# Altium PCB LED.PcbDoc
Units mm, origin at the board's own origin, x right, y up, seen from the top; angles counter-clockwise.
Board outline 32.5 x 32.5 mm, 2 copper layers (Top Layer, Bottom Layer), stack 1.569 mm thick; 19 components, 10 nets, 47 pads, 32 vias.
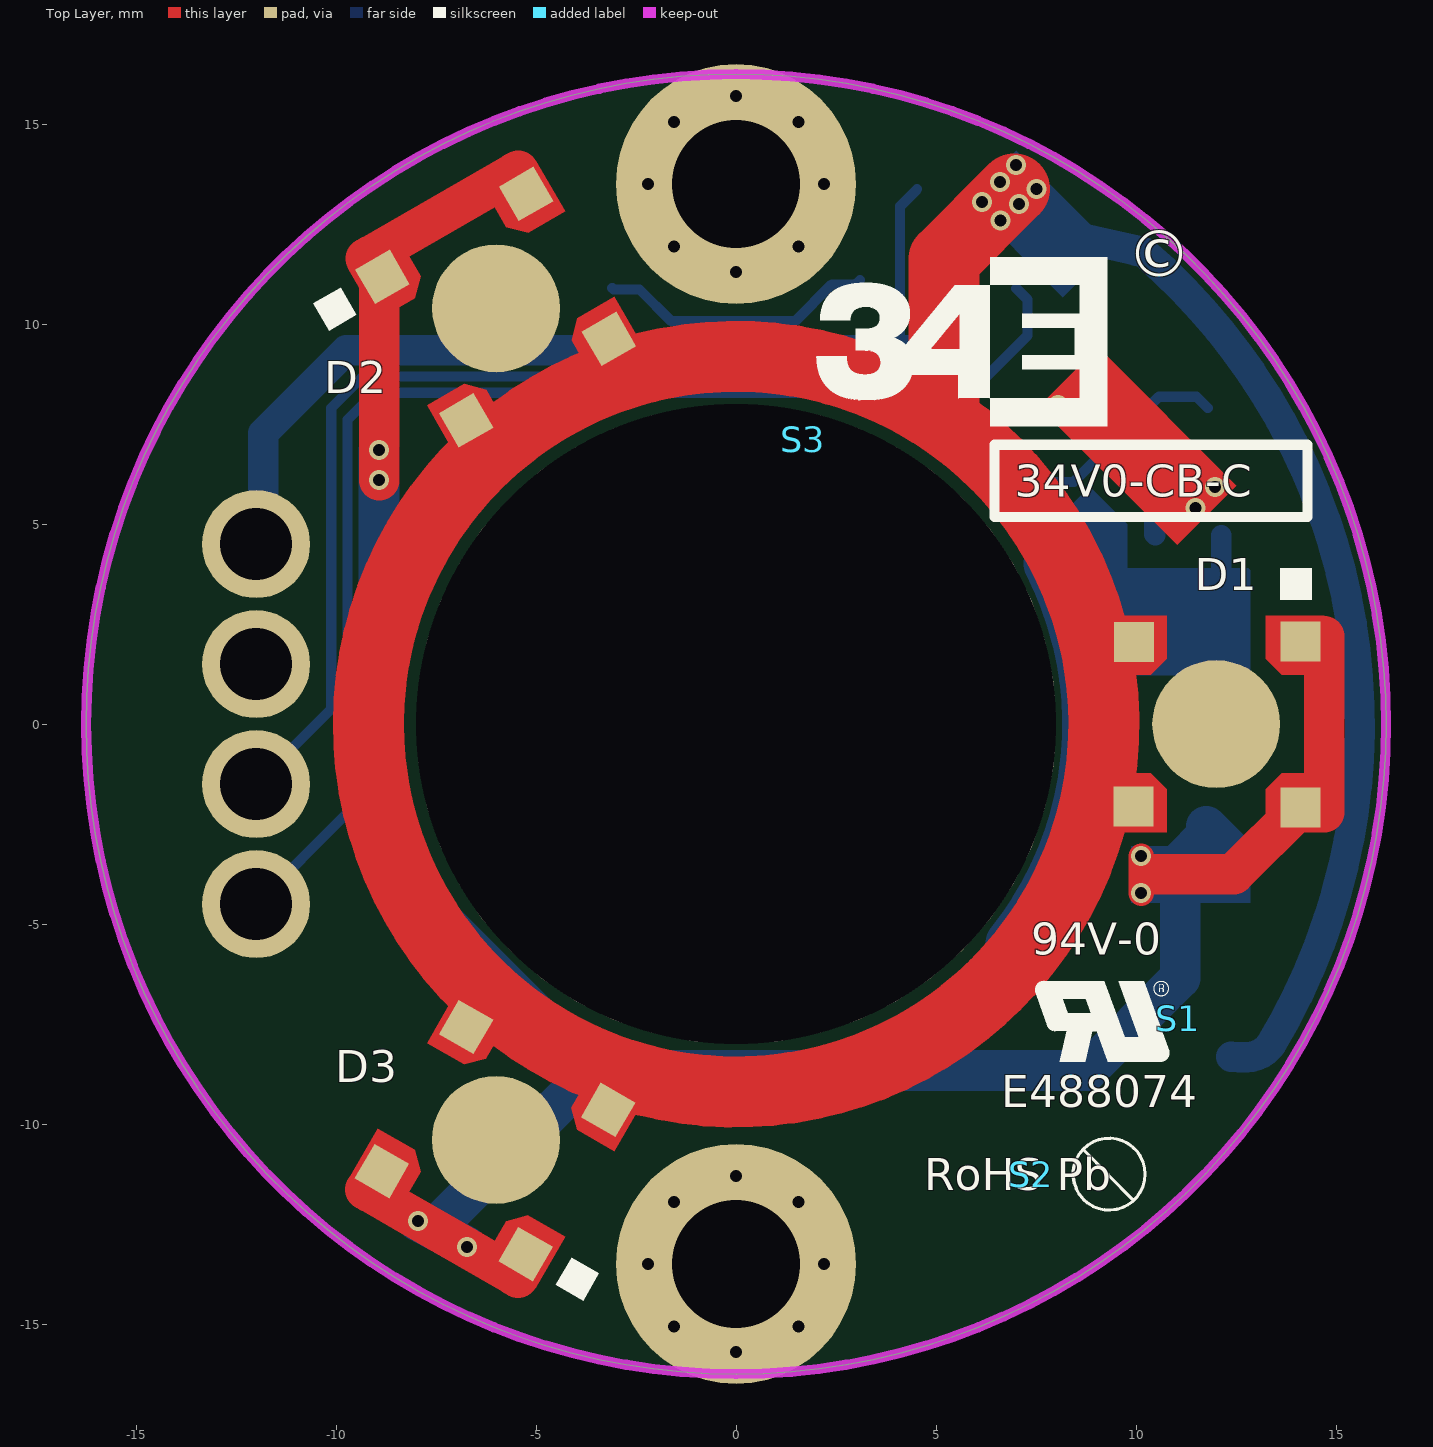
[diagram p0: Top Layer view]
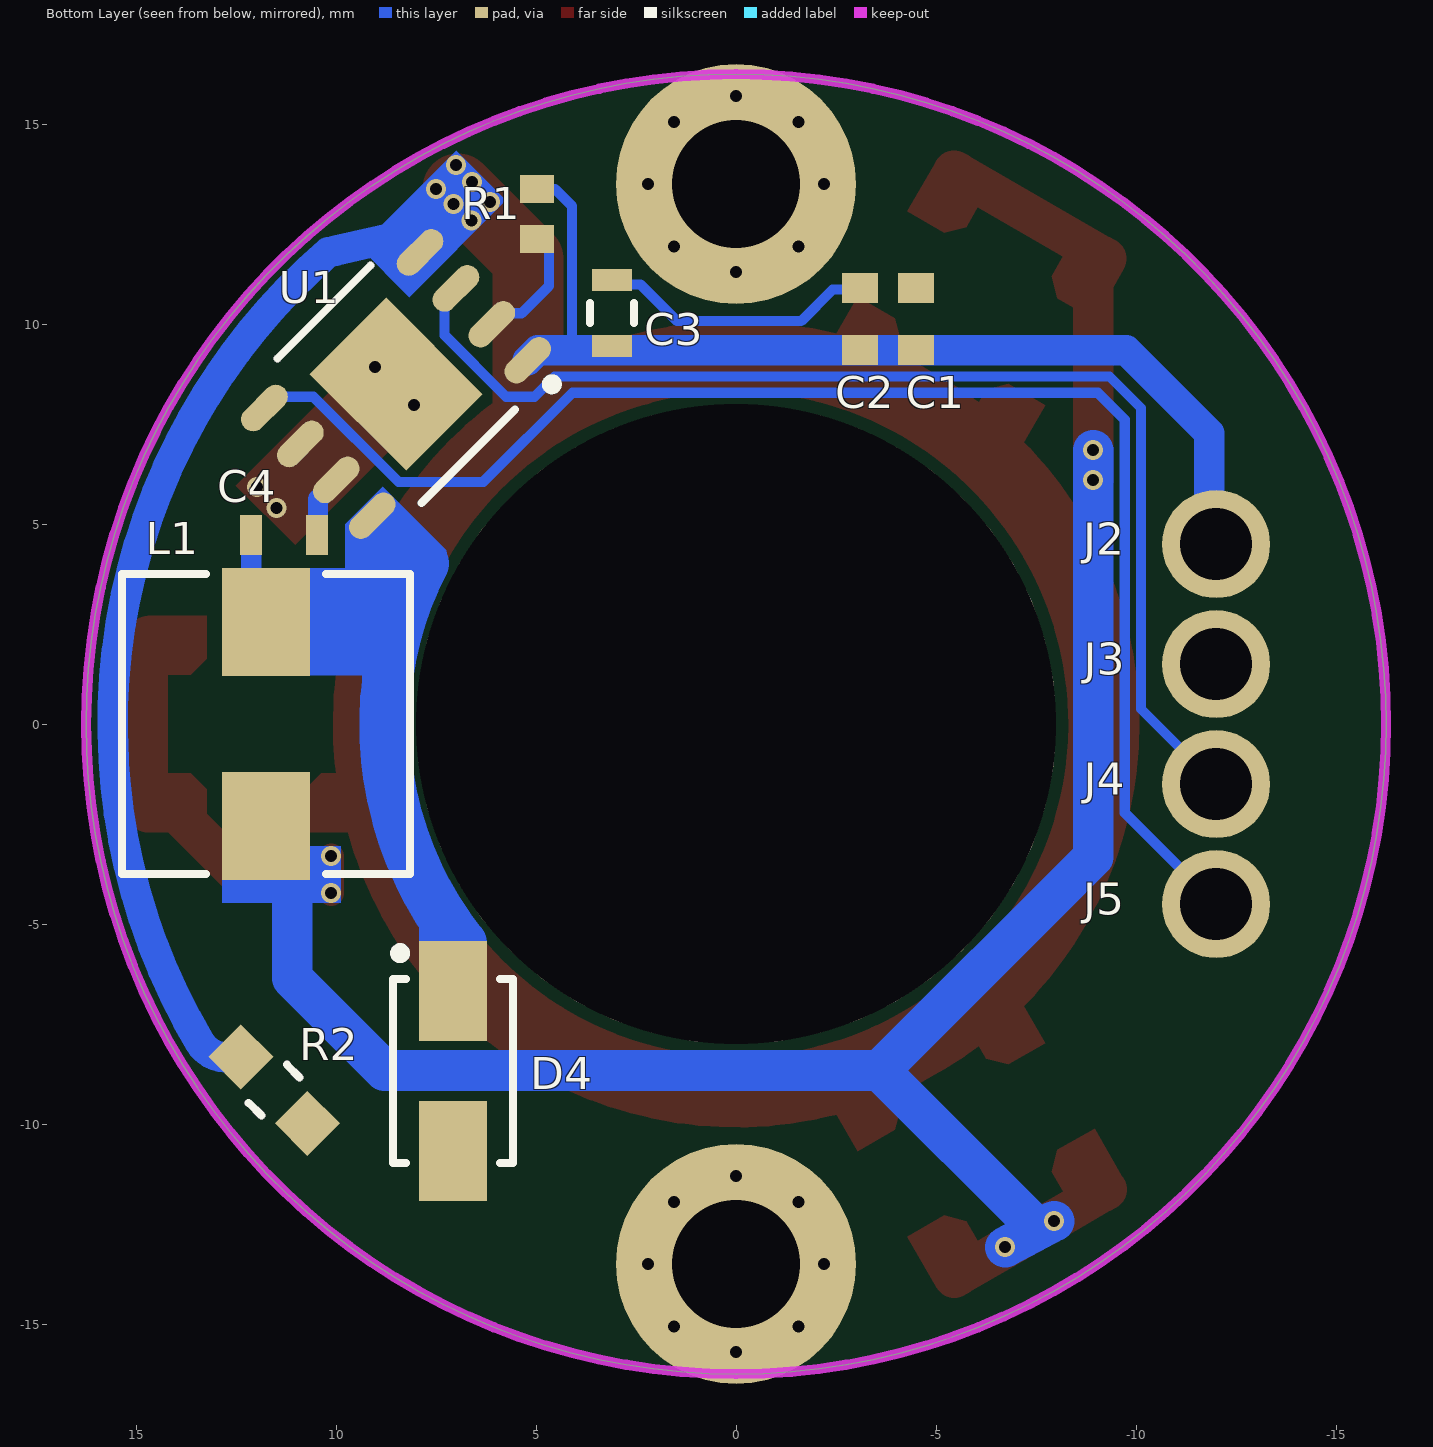
[diagram p1: Bottom Layer view, seen from below]
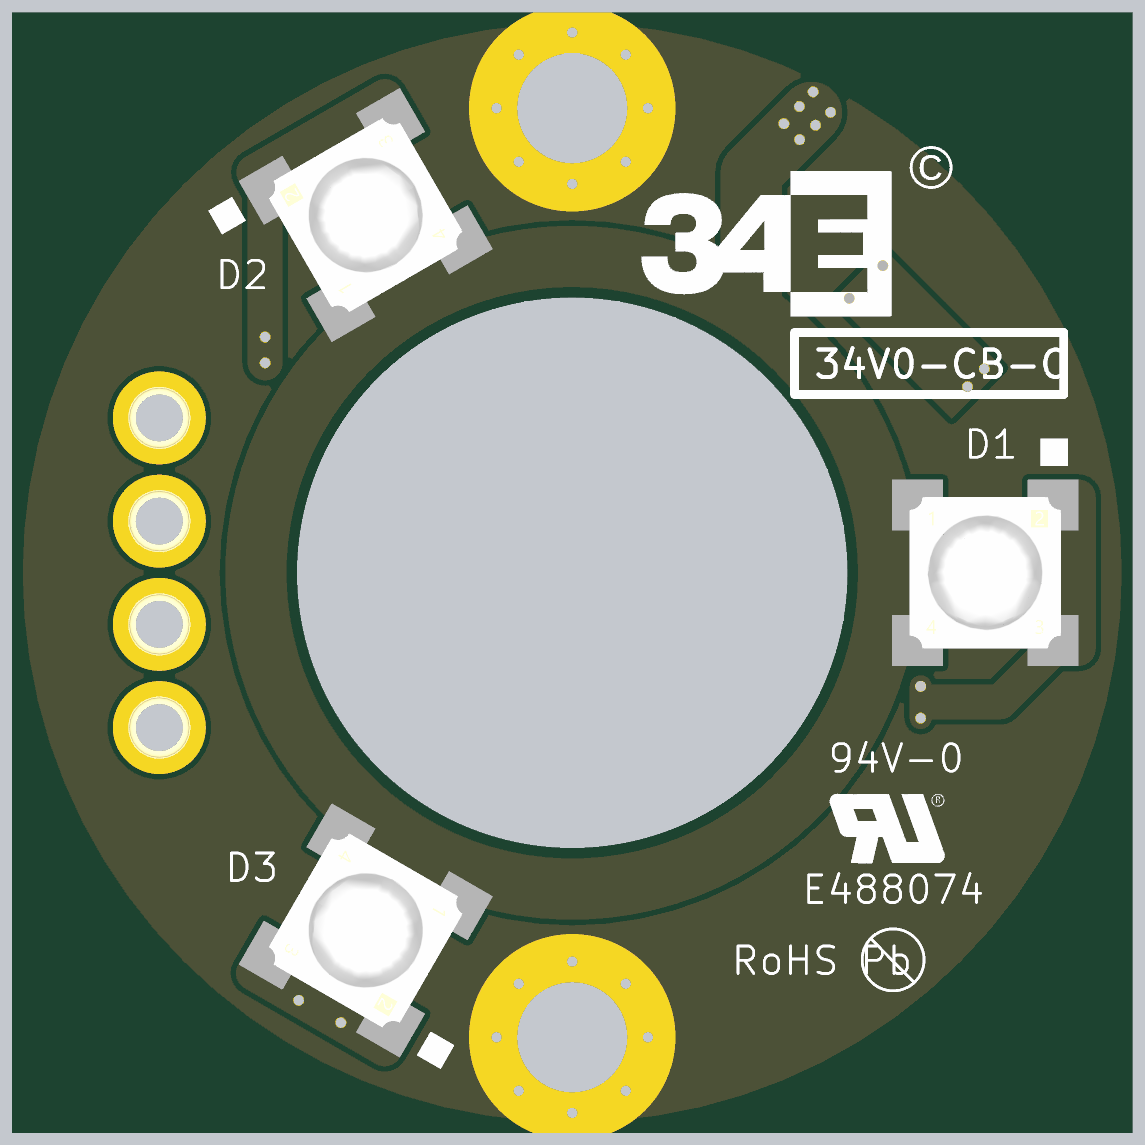
[diagram p2: 3D render of the assembled board from above, using the file's embedded part models]
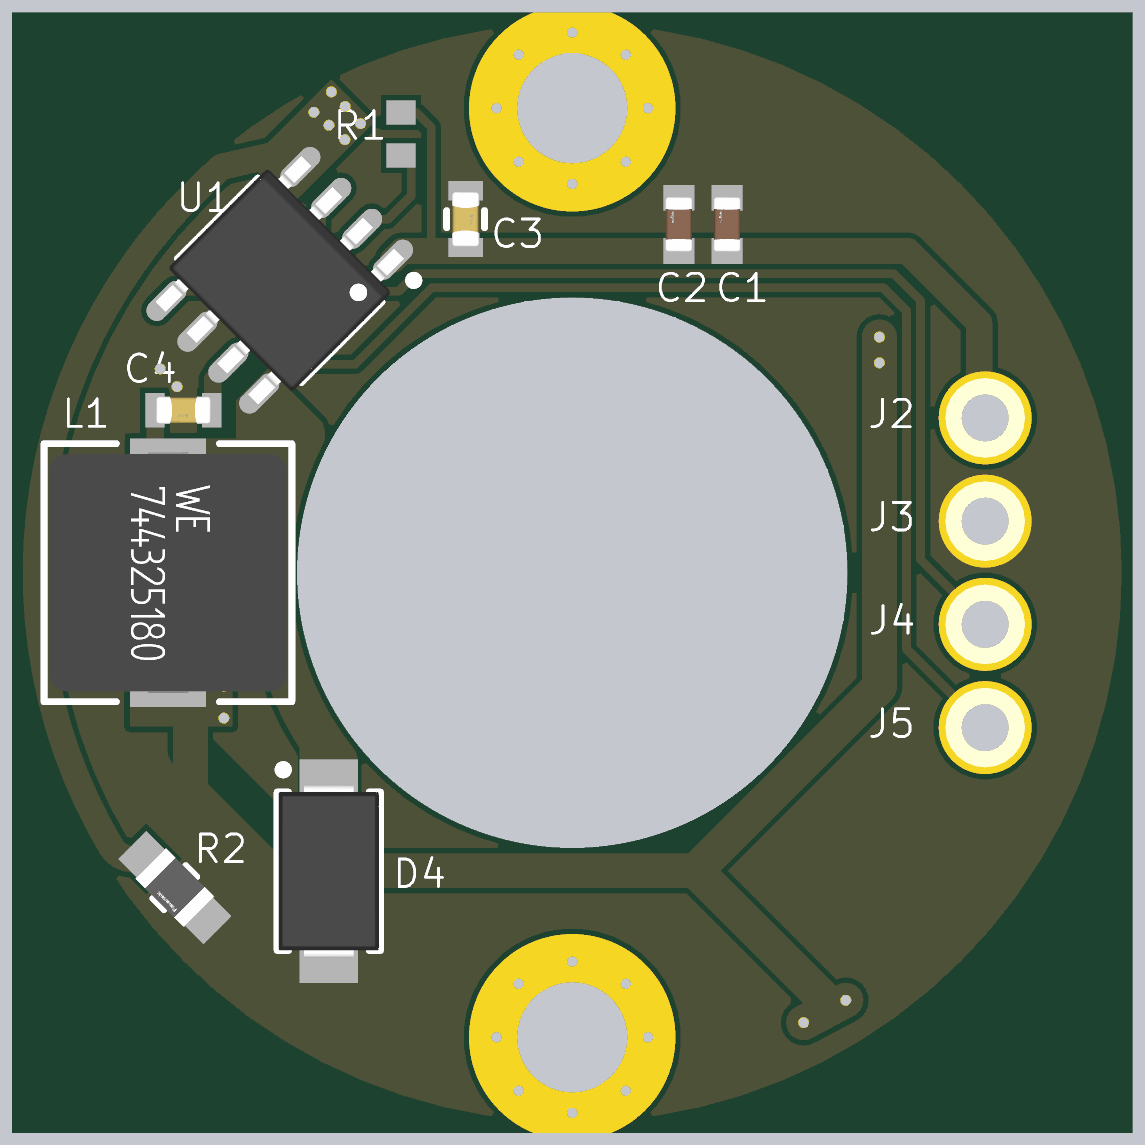
[diagram p3: 3D render of the assembled board from below, using the file's embedded part models]

## Layer stack, top to bottom
Top Solder: solder mask 0.0254, SM-001, Dk 4
Top Layer: signal copper 0.035
Dielectric 1: core 1.4986, Core-043, Dk 4.3
Bottom Layer: signal copper 0.035
Bottom Solder: solder mask 0.0254, SM-001, Dk 4

## Board outline
0,-16.25 cw(c0,0) -16.25,0 cw(c0,0) 0,16.25 cw(c0,0) 16.25,0 cw(c0,0)

## Design rules (kind name [scope] priority, off if disabled: settings)
BoardOutlineClearance BoardOutlineClearance_Polygon [IsPolygon] p1: gap=0.25 ignorepadtopadclearanceinfootprint=FALSE
Clearance [All] p1: gap=0.152 ignorepadtopadclearanceinfootprint=FALSE except(0.203: SMDPad-SMDPad)
HoleSize [All] p1: absolutevalues=TRUE maxlimit=254 minlimit=0.025 maxpercent=80.000 minpercent=20.000
MinimumSolderMaskSliver [All] p1: minsoldermaskwidth=0.127
PlaneClearance [All] p1: clearance=0.203
PlaneConnect [All] p1: planeconnectstyle=Direct reliefexpansion=0.508 reliefentries=4 reliefconductorwidth=0.254 reliefairgap=0.254
PolygonConnect [All] p1: connectstyle=Direct reliefconductorwidth=0.254 reliefentries=4 polygonreliefangle="90 Angle" airgapwidth=0.254
RoutingVias [All] p1: holewidth=0.711 width=1.27 viastyle="Through Hole" minholewidth=0.711 minwidth=1.27 maxholewidth=0.711 maxwidth=1.27
SilkToSilkClearance [All] p1: silktosilkclearance=0
SilkToSolderMaskClearance [IsPad] p1: minsilkscreentomaskgap=0.152 clearancetoexposedcopper=TRUE
SolderMaskExpansion SolderMaskExpansion_Via [Isvia] p1: expansion=0.102 istentingtop=TRUE
SolderMaskExpansion [Not Isvia] p2: expansion=0.051 istentingtop=FALSE
Width [All] p1: maxlimit=12.7 minlimit=0.254 preferedwidth=0.254 minimp=50.000000 maximp=50.000000 favimp=50.000000
24 further rules are at their usual default settings.

## Components (designator, comment, footprint, x,y, rotation, side; value= is the part's Value field where it differs from the comment)
C1 "10uF" FP-GRM188-0_2-MFG -4.5,10.125 r90 bottom
C2 "10uF" FP-GRM188-0_2-MFG -3.096,10.125 r90 bottom
C3 "100nF" FP-CGA3E-0_3-0_1-IPC_C 3.1,10.275 r270 bottom
C4 "100nF" FP-CGA3E-0_3-0_1-IPC_C 11.3,4.725 r0 bottom
D1 "LZ1-00R702-0000" LZ1-00R702-0000 12.003,0 r0 top locked
D2 "LZ1-00R702-0000" LZ1-00R702-0000 -6.001,10.395 r120 top locked
D3 "LZ1-00R702-0000" LZ1-00R702-0000 -6.002,-10.395 r240 top locked
D4 "B340AE-13" B340AE-13 7.075,-8.675 r90 bottom
J2 "7406-0-15-15-18-27-10-0" 7406-0-15-15-18-27-10-0 -12,4.5 r180 bottom locked
J3 "7406-0-15-15-18-27-10-0" 7406-0-15-15-18-27-10-0 -12,1.5 r180 bottom locked
J4 "7406-0-15-15-18-27-10-0" 7406-0-15-15-18-27-10-0 -12,-1.5 r180 bottom locked
J5 "7406-0-15-15-18-27-10-0" 7406-0-15-15-18-27-10-0 -12,-4.5 r180 bottom locked
L1 "744314101" WE-HCI-7050 11.75,0 r270 bottom locked
R1 "430k 1%" RESC1608X55X30LL15T15 4.975,12.75 r90 bottom
R2 "100m" FP-ERJ6D-MFG 11.55,-9.15 r45 bottom
S1 "" UL 11.05,-7.35 r0 top
S2 "" RoHS 7.375,-11.25 r0 top
S3 "" 34EngineeringLogo 1.675,7.125 r0 top
U1 "IS32LT3954-GRLA3-TR" IS32LT3954-GRLA3-TR 8.5,8.5 r315 bottom locked

## Footprints (in the part's own frame and the unit in brackets; to place one, negate y for a bottom-side part, rotate by r counter-clockwise, add the part's x,y. Pads: shape width x height; smd on the part's side, far side on the other; paste and mask are expansions set on the pad)
34EngineeringLogo [mm]
  silkscreen extent 0.33,0.32 7.61,4.55
7406-0-15-15-18-27-10-0 [mm]
  round 2.7 hole 1.803: 1(0,0)
  body extent -1.15,-1.16 1.15,1.15, height 0.7
B340AE-13 [mm] "Molded Diode, 2-Leads, Body 4.30x2.61mm, IPC Medium Density"
  rect 2.5x1.7 smd: A(-2,0) C(2,0)
  silkscreen extent -2.3,-1.5 3.07,1.5, body extent -2.52,-1.46 2.52,1.46, height 2.4
FP-CGA3E-0_3-0_1-IPC_C [mm]
  rect 0.556x1.006 smd paste+0 mask+0: 1(-0.825,0) 2(0.825,0)
  silkscreen extent -0.25,-0.55 0.25,0.55, body extent -0.8,-0.4 0.8,0.4, height 1.1
FP-ERJ6D-MFG [mm]
  rect 1.15x1.15 smd paste+0 mask+0: 1(-1.175,0) 2(1.175,0)
  silkscreen extent -0.23,-0.68 0.23,0.68, body extent -1,-0.62 1,0.62, height 0.7
FP-GRM188-0_2-MFG [mm]
  rect 0.75x0.9 smd paste+0 mask+0: 1(-0.775,0) 2(0.775,0)
  body extent -0.8,-0.4 0.8,0.4, height 1
IS32LT3954-GRLA3-TR [mm] "SOIC, 8-Leads, Body 4.90x3.90mm, Pitch 1.27mm, Thermal Pad 3.41x2.71mm, IPC Medium Density"
  oval 1.4x0.6 smd: 1(-2.75,1.905) 2(-2.75,0.635) 3(-2.75,-0.635) 4(-2.75,-1.905) 5(2.75,-1.905) 6(2.75,-0.635) 7(2.75,0.635) 8(2.75,1.905)
  rect 2.71x3.41 smd: 9(0,0)
  silkscreen extent -2.87,-2.55 1.65,2.88, body extent -3,-2.55 3,2.55, height 1.7
LZ1-00R702-0000 [mm]
  rect 1x1 smd paste+0 mask+0: 1(-2.05,2.05) 2(2.103,2.068) 3(2.103,-2.082) 4(-2.072,-2.057)
  round 3.2 smd: 5(0,0)
  Top Layer region: -2.704,-2.704 -2.704,-1.234 -1.634,-1.234 -1.234,-1.634 -1.234,-2.704
  Top Layer region: 2.704,2.704 2.704,1.234 1.634,1.234 1.234,1.634 1.234,2.704
  Top Layer region: 2.704,-2.704 1.234,-2.704 1.234,-1.634 1.634,-1.234 2.704,-1.234
  Top Layer region: -2.704,2.704 -1.234,2.704 -1.234,1.634 -1.634,1.234 -2.704,1.234
  silkscreen extent 1.6,3.1 2.4,3.9, body extent -2.2,-2.2 2.2,2.2, height 2.4
RESC1608X55X30LL15T15 [mm] "Chip Resistor, 2-Leads, Body 1.60x0.80mm, IPC High Density"
  rect 0.7x0.85 smd: 1(-0.625,0) 2(0.625,0)
  body extent -0.87,-0.48 0.87,0.48, height 0.55
RoHS [mm]
  silkscreen extent 1.05,-0.9 2.85,0.9
UL [mm]
  silkscreen extent -3.57,-1.1 -0.22,0.93
WE-HCI-7050 [mm] "SMD Inductor, 2-Leads, Body 7.0 x 6.9 mm"
  rect 2.7x2.2 smd: 1(-2.55,0) 2(2.55,0)
  silkscreen extent -3.75,-3.6 3.75,3.6, body extent -3.5,-3.45 3.5,3.45, height 4.98

## Part data
C1 C2: library part CMP-2006-02520-2, "Chip Multilayer Ceramic Capacitors for General Purpose, 0603, 10uF, X5R, 15%, 20%, 25V", Case Code (Imperial)=0603, Case Code (Metric)=1608, Dielectric=X5R, Max Operating Temperature=85°C, Min Operating Temperature=-55°C, Package Quantity=1, Resistor Type=Ceramic, Tolerance=20%, Voltage=25V, Capacitance=10uF, Case/Package=0603, Depth=0.8mm, Height=0.8mm, Lead Free="Lead Free", Length=1.6mm, Mount="Surface Mount", Number of Pins=2, Packaging="Tape and Reel", REACH SVHC="No SVHC", Termination=SMD/SMT, Thickness=0.031inch, Voltage Rating=25V, Voltage Rating (DC)=25V, Weight=0.000222oz, Width=0.031inch
C3 C4: library part CMP-2000-07546-2, "Cap Ceramic 100nF 50V X7R 10% Pad SMD 0603 +125°C Automotive T/R", Case Code (Imperial)=0603, Case Code (Metric)=1608, Dielectric=X7R, Max Operating Temperature=125°C, Min Operating Temperature=-55°C, Package Quantity=1, Ratings=AEC-Q200, Tolerance=10%, Voltage=50V, Capacitance=100nF, Case/Package=0603, Composition=Ceramic, Depth=0.8mm, Height=0.8mm, Lead Free="Lead Free", Length=1.6mm, Mount="Surface Mount", Packaging="Tape and Reel", Radiation Hardening=No, REACH SVHC="No SVHC", Termination=SMD/SMT, Thickness=0.035inch, Voltage Rating=50V, Voltage Rating (DC)=50V, Weight=7.1E-05oz, Width=0.8mm
D1 D2 D3: "IR Emitter 940nm 1600mW 1200mA 3.05V 4-Pin CSMD T/R", Case/Package=SMD/SMT, Forward Voltage=3V, Manufacturer="LED Engin", ComponentLink1Description=http://www.ledengin.com/files/products/LZ1/LZ1-00R702.pdf?src-supplier=Digi-Key, ComponentLink1URL=http://www.ledengin.com/files/products/LZ1/LZ1-00R702.pdf?src-supplier=Digi-Key, Manufacturer Part Number=LZ1-00R702-0000, Mount="Surface Mount", Orientation="Top View", Packaging="Tape and Reel", RoHS=Yes, Supplier 1="Arrow Electronics", Supplier Part Number 1=LZ1-00R702-0000, Touchscreen="Infrared (IR)", Viewing Angle=90°, Wavelength=940nm
D4: "Rectifier Diode Schottky 40V 3A 2-Pin SMA T/R", Average Rectified Current=2A, Case/Package=SMA, Manufacturer=Diodes, Max Reverse Voltage (DC)=40V, Supplier Part Number 1=07AH3680, Category="Rectifier Diodes", ComponentLink1Description=https://www.diodes.com/assets/Datasheets/B320AE-B345AE.pdf?src-supplier=Digi-Key, ComponentLink1URL=https://www.diodes.com/assets/Datasheets/B320AE-B345AE.pdf?src-supplier=Digi-Key, Manufacturer Part Number=B340AE-13, Mount="Surface Mount", Packaging="Tape and Reel", Pricing 1="1=0.56000, 5=0.56000, 10=0.46300, 25=0.41400, 50=0.36500, 100=0.31600, 250=0.27700, 500=0.23700, 1000=0.17800 (USD)", RoHS=Yes, RoHS Compliant=Yes, Stock 1=4255, Supplier 1=Newark
J2 J3 J4 J5: "3.05 mm PCB Through Hole Pin Receptacle for (0.94 to 1.09 mm Pin) w/ No Tail", Current Rating=8A, Manufacturer=Mill-Max, Package Quantity=500, Category=Terminals, ComponentLink1Description=https://datasheet.ciiva.com/12487/7406-0-15-15-18-27-10-0-72490-12487100.pdf?src-supplier=Mouser, ComponentLink1URL=https://datasheet.ciiva.com/12487/7406-0-15-15-18-27-10-0-72490-12487100.pdf?src-supplier=Mouser, Hole Diameter=1.8mm, Lead Free="Contains Lead", Length=0.12inch, Manufacturer Part Number=7406-0-15-15-18-27-10-0, Material="BERYLLIUM COPPER ALLOY", Mount="Through Hole", Outside Diameter=2.31mm, Packaging=Bulk, Plating=Gold, Pricing 1="1=0.49460, 10=0.42540 (USD)", RoHS=Yes, RoHS Compliant=Yes, Stock 1=1000, Supplier 1="Arrow Electronics", Supplier Part Number 1=7406-0-15-15-18-27-10-0, Termination=Solder
L1: library part CMP-0226-00077-1, "SMD Flat Wire High Current Inductor WE-HCI, L=10.0 µH", Inductance="10.0 ÂµH", ComponentLink1Description="Manufacturer Link", ComponentLink1URL=http://www.we-online.com, ComponentLink2Description=Datasheet, ComponentLink2URL=http://www.we-online.de/katalog/media/pdf/744314101.pdf, DatasheetVersion="ver 1, Aug-2009", PackageDescription="SMD Inductor, 2-Leads, Body 7.0 x 6.9 mm", PackageReference=WE-HCI-7050, PackageVersion=2008
R1: library part CMP-2000-00500-1, Manufacturer=Panasonic, Part Number=ERJ-3EKF4303V
R2: library part CMP-05422-000098-1, "RES 0.1 OHM 1% 1/2W 0805", Case Code (Imperial)=0805, Case Code (Metric)=2012, Max Operating Temperature=155°C, Max Power Dissipation=500mW, Min Operating Temperature=-55°C, Resistance=100mR, Resistor Type="Thick Film", Temperature Coefficient=150ppm/°C, Tolerance=1%, Case/Package=0805, Features="Automotive AEC-Q200", Height=0.028inch, Length=0.079inch, Number of Terminations=2, Packaging="Cut Tape", Width=0.049inch
S1: library part UL
S2: library part RoHS
S3: library part 34EngineeringLogo, "34 Engineering Silkscreen Logo"
U1: "3.0A Dimmable Buck Switching Regulator with Fault Reporting, Spread Spectrum, SOP-8-EP", Manufacturer=ISSI, Supplier Part Number 1=2521-IS32LT3954-GRLA3-TRCT-ND, Manufacturer Part Number=IS32LT3954-GRLA3-TR, Pricing 1="1=1.94000, 10=1.74200, 25=1.64320, 100=1.39980, 250=1.31440, 500=1.15010, 1000=0.95294 (USD)", RoHS=Yes, RoHS Compliant=Yes, Stock 1=27850, Supplier 1=Digi-Key

## Free pads (board coordinates)
  round 6 hole 3.2 unplated: 1(0,-13.5) 1(0,13.5)
  round 16 hole 16 unplated: 1(0,0)

## Via types
v1: diameter 0.5, hole 0.3, Top Layer to Bottom Layer, tented both sides, 32 vias

## Nets (pads, with @x,y where several pads share a name; then routed paths per layer and width w, separated by ;. In a path a pad name is that pad's centre, name@x,y a point inside that pad or via, vN(x,y) a via of type N, cw(c..) or ccw(c..) an arc to the next point about the centre after c; other vN are vias at no path point)
+12: C1.1 C2.1 C3.2 J2.1 R1.2 U1.1 | length 26.3
  Bottom Layer w0.254: -6.35,9.4 -6.3,9.35 ; C3.2@2.742,9.383 C3.2@2.775,9.35 ; C3.2 3.951,9.45 4.1,9.599 4.1,12.95 4.525,13.375
  Bottom Layer w0.762: J2.1@-11.825,4.082 -11.825,7.275 -9.75,9.35 -6.3,9.35 2.775,9.35 3.525,9.35 3.882,9.35 4.956,9.35 U1.1
ENC: D1.5 D2.5 D3.5 pad.1@0,13.5 pad.1@0,-13.5
  other v1: 0,-15.7 -1.556,-15.056 1.556,-15.056 -2.2,-13.5 2.2,-13.5 -1.556,-11.944 1.556,-11.944 0,-11.3 0,11.3 -1.556,11.944 1.556,11.944 -2.2,13.5 2.2,13.5 -1.556,15.056 1.556,15.056 0,15.7
GND: C1.2 C2.2 C3.1 D4.A J3.1 R2.1 U1.6 U1.9 | length 7
  Bottom Layer w0.254: C2.2 -3.06,10.864 -2.414,10.864 -1.625,10.075 1.475,10.075 2.394,10.994 2.994,10.994 C3.1
  other v1: 11.486,5.407 11.975,5.925 8.05,7.975 9.025,8.925
LED_A: D1.2 D1.3 D2.2 D2.3 D3.2 D3.3 L1.2 | length 68.6
  Top Layer w0.635: v1(10.125,-4.225) v1(10.125,-3.3)
  Top Layer w1.016: -9.265,-11.633 -9.157,-11.695 -7.936,-12.401 -6.736,-13.094 -5.563,-13.77 -5.452,-13.835 ; -9.253,11.64 -9.144,11.703 -5.55,13.778 -5.447,13.837 ; v1(-8.925,6.1) v1(-8.925,6.85) -8.925,11.1 D2.2 ; 10.4,-3.751 12.437,-3.751 D1.3 ; 14.706,-2.201 14.706,2.2
  Bottom Layer w1.016: v1(-8.925,6.85) -8.927,6.848 -8.927,-3.321 -3.587,-8.66 ; v1(-7.95,-12.425) v1(-6.725,-13.075) ; -7.7,-12.525 -7.452,-12.525 -3.587,-8.66 ; L1.2@11.1,-3.771 11.1,-6.35 8.79,-8.66 -3.587,-8.66 ; L1.2@11.158,-3.392 11.75,-2.8 L1.2 L1.2@12.319,-3.119
LED_BOOT: C4.1 U1.7 | length 1.6
  Bottom Layer w0.508: U1.7 9.996,6.082 10.451,5.626 10.451,4.749 C4.1
LED_C: D1.1 D1.4 D2.1 D2.4 D3.1 D3.4 R2.2 U1.4 | length 89
  Top Layer w1.778: 5.2,7.945 5.2,11.625 6.955,13.38 ; 8.995,1.905 ccw(c0,0) 9.033,1.716
  Bottom Layer w0.762: 7.887,12.325 10.007,11.838 10.193,11.795 cw(c0,0) 13.407,-7.956 cw(c12.752,-7.566) 12.766,-8.328 cw(c12.695,-4.512) R2.2@12.381,-8.316
  other v1: 6.61,12.587 7.07,13.006 6.15,13.05 7.508,13.382 6.6,13.55 7,13.975
LED_FAULT: J5.1 U1.5 | length 36.8
  Bottom Layer w0.254: J5.1 -9.714,-2.214 -9.714,7.611 -9.042,8.283 4.092,8.283 6.318,6.057 8.44,6.057 10.569,8.185 11.509,8.185 U1.5
LED_LX: C4.2 D4.C L1.1 U1.8 | length 12.4
  Bottom Layer w0.508: L1.1 12.125,2.925 C4.2
  Bottom Layer w1.27: D4.C@6.868,-5.481 ccw(c0,0) 7.816,4.016
LED_PWM: J4.1 U1.3 | length 30.1
  Bottom Layer w0.254: J4.1 -10.121,0.379 -10.121,7.904 -9.335,8.69 4.535,8.69 5.041,8.184 5.752,8.184 7.287,9.719 7.287,10.611 U1.3
LED_TON: R1.1 U1.2 | length 2.8
  Bottom Layer w0.254: R1.1@4.682,11.968 4.682,10.951 5.362,10.271 5.831,10.271 U1.2

## Polygon pours and split planes (outlines as drawn)
ENC on Top Layer "Top ENC Pour" (solid, shelved, pour order 2): -20.32,20.32 20.32,20.32 20.32,-20.32 -20.32,-20.32
GND on Bottom Layer "Bottom GND Pour" (solid, shelved, pour order 1): -20.32,20.32 20.32,20.32 20.32,-20.32 -20.32,-20.32

## Keep-outs
Keep-Out Layer:
  the board outline again, w0.254

## Other copper
Top Layer:
  region net GND: 11.025,4.475 12.512,5.962 9.05,9.425 7.562,7.938
Bottom Layer:
  rectangle net LED_LX: 7.474,-5.672 7.925,-4.808
  rectangle net LED_A: 9.875,-4.475 12.855,-3.05
  region net LED_C: 8.169,10.669 9.421,11.921 6.999,14.344 5.746,13.091
  region net LED_LX: 9.775,5 8.837,5.937 7.242,4.342 7.214,4.073 7.825,2.95 8.268,1.225 12.85,1.225 12.85,3.85 12.8,3.9 9.775,3.9

## Silkscreen, mask and mechanical layers (free items; w line width, h text height)
Top Overlay:
  lines w0.254: 6.462,5.18 14.285,5.18 14.285,6.983 6.462,6.983 6.462,5.18
  text "34V0-CB-C" at 6.963,5.681 h0.8
Mechanical 1:
  the board outline again, w0.254

## Text inside footprints (layer, text, board x,y; h text height)
S1: Top Overlay "94V-0" at 7.38,-5.77 h0.8; Top Overlay "E488074" at 6.63,-9.58 h0.8
S2: Top Overlay "RoHS Pb" at 4.709,-11.65 h0.8
S3: Top Overlay "©" at 9.779,10.8 h2